# Altium PCB Copy of KDAT_PCB.PcbDoc
Units mil, origin at the board's own origin, x right, y up, seen from the top; angles counter-clockwise.
Board outline 3385 x 2285 mil, 2 copper layers (Top Layer, Bottom Layer); 26 components, 16 nets, 69 pads, 0 vias.
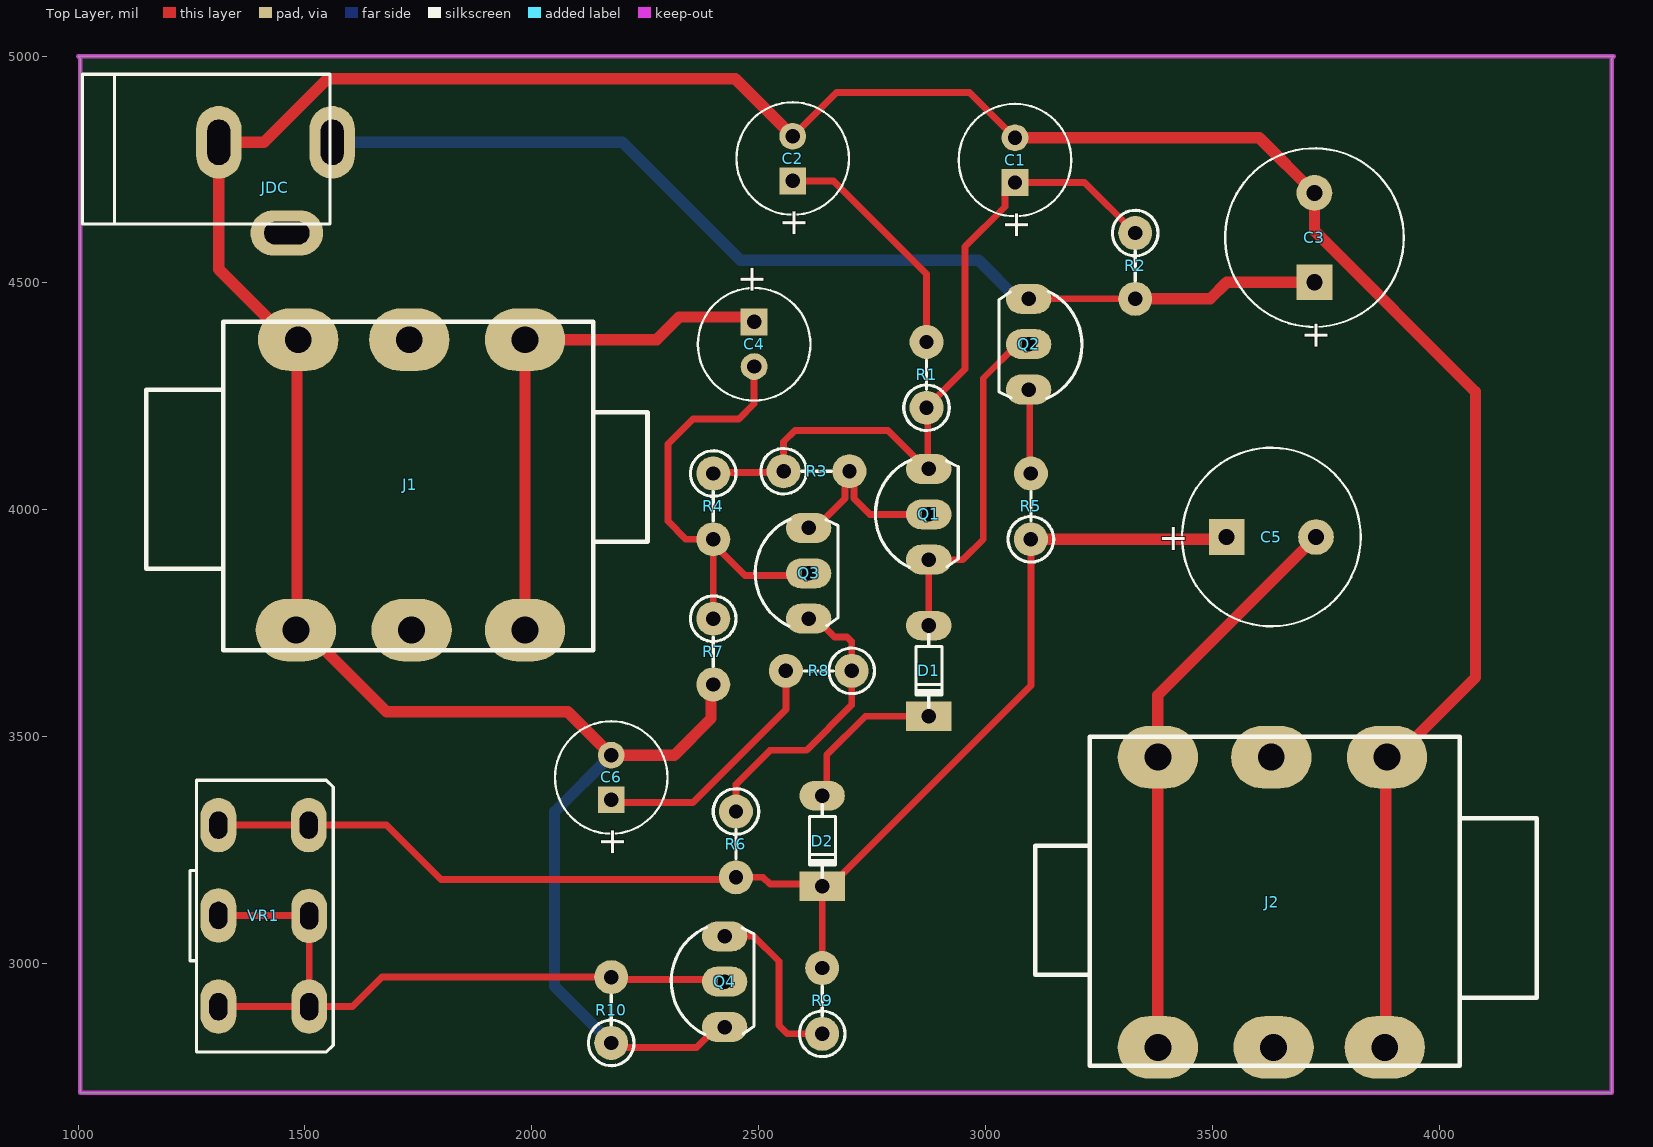
[diagram p0: Top Layer view]
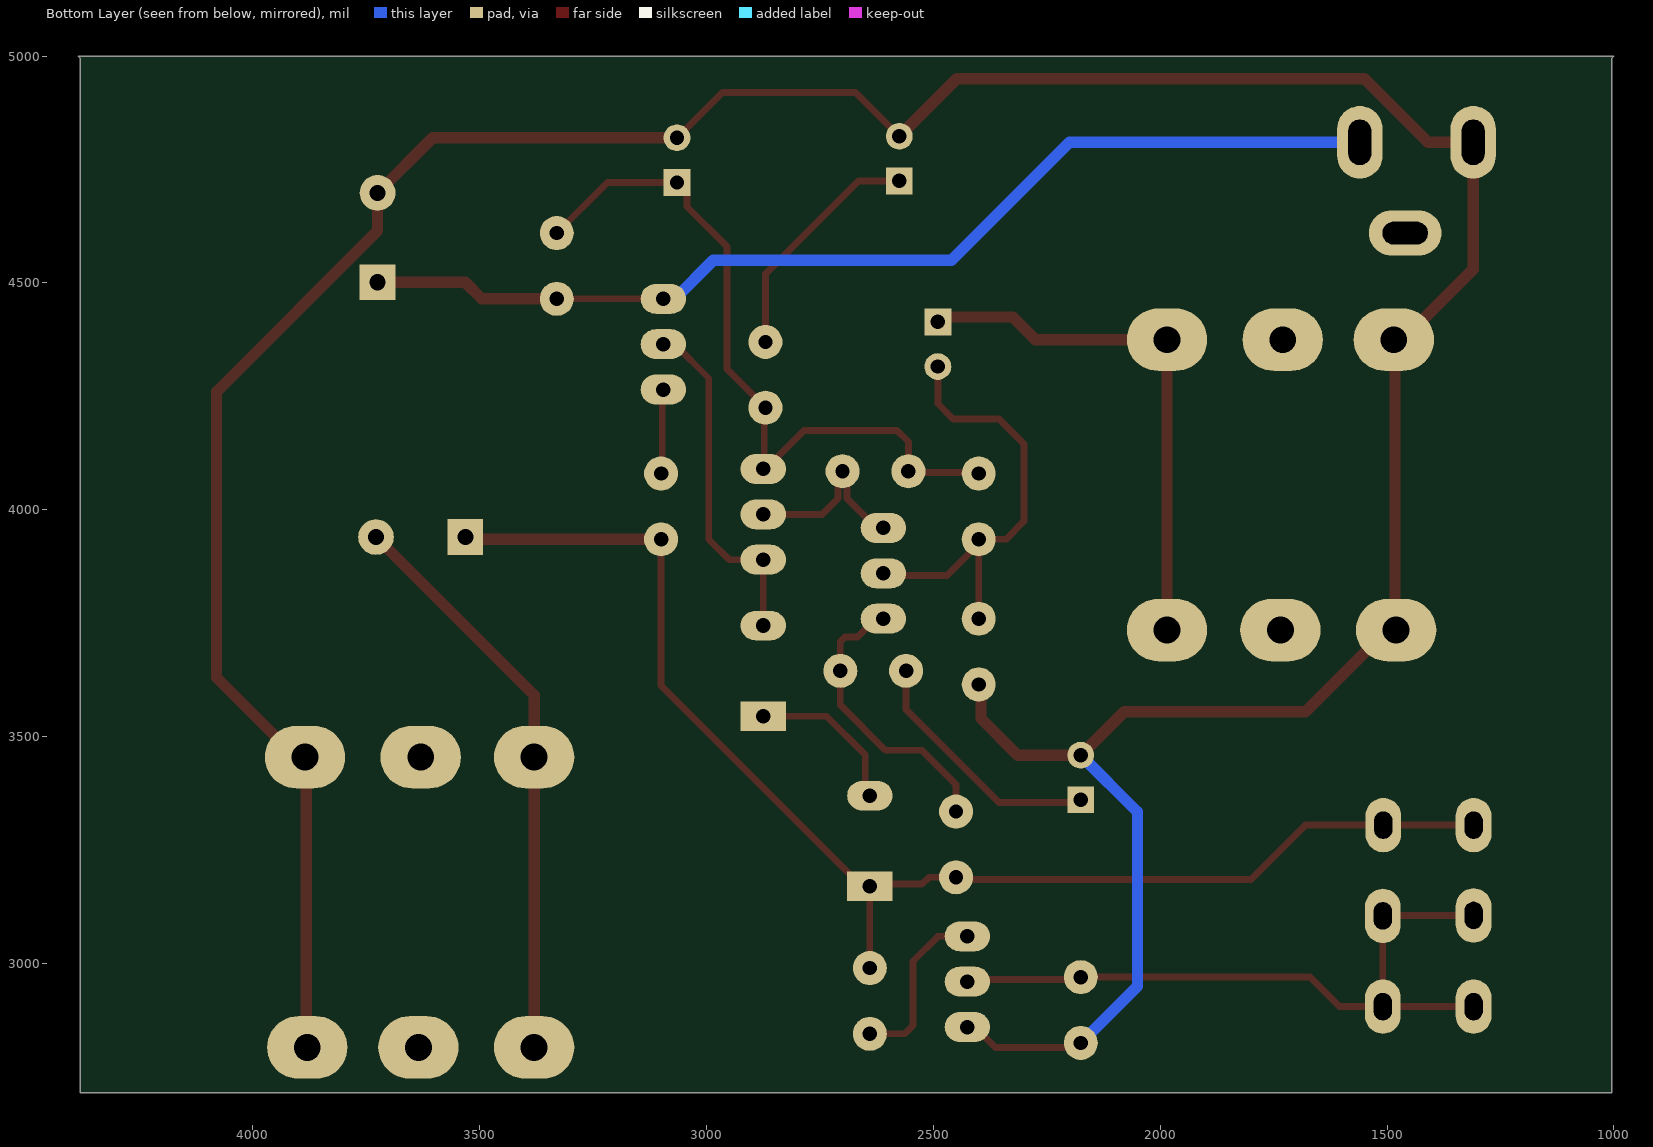
[diagram p1: Bottom Layer view, seen from below]

## Layer stack, top to bottom
Top Solder: solder mask 0.4, Solder Resist, Dk 3.5
Top Layer: signal copper 1.4
Dielectric 1: dielectric 12.6, FR-4, Dk 4.8
Bottom Layer: signal copper 1.4
Bottom Solder: solder mask 0.4, Solder Resist, Dk 3.5

## Board outline
1005,2715 4380,2715 4380,4995 4385,5000 1000,5000 1005,4995

## Design rules (kind name [scope] priority, off if disabled: settings)
Clearance [All] p1: gap=12 ignorepadtopadclearanceinfootprint=FALSE
PolygonConnect [All] p1: connectstyle=Relief reliefconductorwidth=10 reliefentries=4 polygonreliefangle="90 Angle" airgapwidth=10
RoomDefinition KĐAT_Sch [InComponentClass('KĐAT_Sch')] p1: confinementstyle=ConfineIn formatcopy=TRUE lockcomponents=FALSE outline 0,2715 4382.5,2715 4382.5,4997.5 0,4997.5
RoutingVias [All] p1: holewidth=0.4 width=0.8 viastyle="Through Hole" minholewidth=0.4 minwidth=0.8 maxholewidth=0.4 maxwidth=0.8
SolderMaskExpansion [All] p1: expansion=4 istentingtop=FALSE
Width [All] p1: maxlimit=30 minlimit=12 preferedwidth=15
30 further rules are at their usual default settings.

## Classes and differential pairs
component class KĐAT_Sch: C1 C2 C4 C6 D1 D2 J1 J2 JDC Q1 Q2 Q3 Q4 R1 R2 R3 R4 R5 R6 R7 R8 R9 R10 VR1

## Components (designator, comment, footprint, x,y, rotation, side; value= is the part's Value field where it differs from the comment)
C1 "220uF" CA-ALU-6.3 3065,4770.79 r90 top value=104
C2 "470uF" CA-ALU-6.3 2575,4774.21 r90 top value=104
C3 "2200uF" CA-ALU-10 3725,4600 r90 top value=104
C4 "10uF" CA-ALU-6.3 2490,4365 r270 top value=104
C5 "2200uF" CA-ALU-10 3630,3940 r0 top value=104
C6 "330uF" CA-ALU-6.3 2175,3410 r90 top value=104
D1 "1N4148" DIO-0.5A-SMALL 2875,3645 r90 top value=1N5007
D2 "1N4148" DIO-0.5A-SMALL 2640,3270 r90 top value=1N5007
J1 "AUDIO MIC BLACK HEADER" "CON MIC2" 1490,3940 r0 top
J2 "AUDIO MIC BLACK HEADER" "CON MIC2" 3875,3250 r180 top
JDC "Jac DC" DC0 1435,4710 r0 top
Q1 "C828" TO92-123 2875,3990 r90 top value=C1815
Q2 "A564" TO92-123 3095,4365 r270 top value=A1015
Q3 "C828" TO92-123 2610,3860 r90 top value=C1815
Q4 "C828" TO92-123 2425,2960 r90 top value=C1815
R1 "27K" RES-1/4WD 2870,4290 r90 top
R2 "330" RES-1/4WD 3330,4545 r270 top
R3 "15K" RES-1/4WD 2620,4085 r0 top
R4 "27K" RES-1/4WD 2400,4015 r270 top
R5 "1" RES-1/4WD 3100,4000 r90 top
R6 "22K" RES-1/4WD 2450,3270 r270 top
R7 "100K" RES-1/4WD 2400,3695 r270 top
R8 "1K" RES-1/4WD 2640,3645 r180 top
R9 "1" RES-1/4WD 2640,2910 r90 top
R10 "470" RES-1/4WD 2175,2890 r90 top
VR1 "470" VR-D1 1309.27,3105 r270 top value="Volume Dual 50K"

## Footprints (in the part's own frame and the unit in brackets; to place one, negate y for a bottom-side part, rotate by r counter-clockwise, add the part's x,y. Pads: shape width x height; smd on the part's side, far side on the other; paste and mask are expansions set on the pad)
CA-ALU-6.3 [mm] "Polarized capacitors, Aluminum Electrolytic Capacitors, 2-Leads, Body 6.3x15x2.5x0.5"
  rect 1.5x1.5 hole 0.8: 1(-1.25,0)
  round 1.5 hole 0.8: 2(1.25,0)
  silkscreen extent -3.15,-3.15 3.15,3.15, body extent -3.12,-3.15 3.18,3.15, height 11
CA-ALU-10 [mm] "Polarized capacitors, Aluminum Electrolytic Capacitors, 2-Leads, Body 10x20x5x0.6"
  rect 2x2 hole 0.9: 1(-2.5,0)
  round 2 hole 0.9: 2(2.5,0)
  silkscreen extent -5,-5 5,5, body extent -5.08,-5.08 5.08,5.08, height 20.52
"CON MIC2" [mm]
  oval 4.5x3.5 hole 1.5: 1(-0.254,-5.207) 1(-0.127,11.049) 2(6.096,11.049) 2(6.223,-5.207) 3(12.573,-5.207) 3(12.573,11.049)
  silkscreen extent -8.64,-6.35 19.43,12.06, body extent -12.47,-6.23 19.33,11.97, height 16.3
DC0 [mil] "Jac DC input"
  oval 100x160 hole 50 slot 100 at 90 deg: 1(125,100) 2(-125,100)
  oval 160x100 hole 50 slot 100 at 0 deg: 3(25,-100)
  silkscreen extent -425,-80 120,250, body extent -410,-105 134,269, height 434
DIO-0.5A-SMALL [mil] "Diode muoi, W 80mil, L 300mil"
  oval 65x100 hole 32: 1(100,0)
  rect 65x100 hole 32: 2(-100,0)
  silkscreen extent -80,-30 80,28, body extent -108,-33 108,32, height 61
RES-1/4WD [mil]
  round 75 hole 31.5: 1(-65,0) 2(80,0)
  silkscreen extent -115,-50 40,50, body extent -112,-45 92,46, height 379
TO92-123 [mil] "TO-92"
  oval 66x100 hole 32: 1(-100,0) 2(0,0) 3(100,0)
  silkscreen extent -117,-65 120,118, body extent -109,-66 109,95, height 245
VR-D1 [mil] "Volume control Dual"
  oval 120x78.74 hole 40 slot 60 at 0 deg: 1(-200,0) 2(-1,0) 3(200,0) 4(-200,199) 5(0,200) 6(200,200)
  silkscreen extent -299,-63 300,253, body extent -339,-1309 331,299, height 835

## Part data
C1 C2 C3 C4 C5 C6: library part CN-ALU-DIP, "Capacitor (Semiconductor SIM Model)", LatestRevisionDate=17-Jul-2002, LatestRevisionNote="Re-released for DXP Platform.", PackageReference=C1206, Publisher="Altium Limited"
D1 D2: library part Diode, "Default Diode", Code - JEDEC=DO-214-AB, Published=8-Jun-2000, Publisher="Altium Limited", Revision="July-2002: Re-released for DXP Platform."
J1 J2: library part "CON MIC2", "Connector, 3.5mm Stereo Audio Socket, Black, 2 break contacts (normals) and 2 auxiliary make contacts", Category=Connector, Connector type="AUDIO BLACK HEADER", Status=Production
JDC: library part DCIN, "Jac DC input"
Q1 Q3 Q4: library part 2N222, "NPN 600mW, ECB"
Q2: library part 2N3906, "PNP 600mW, ECB"
R1 R2 R3 R4 R5 R6 R7 R8 R9 R10: library part Res, "Res", Manufacturer="Generic Components", Class=Passive, Published=08/06/2000, Publisher="Altium Hobart Technology Centre", SubClass=R
VR1: library part VR-D, "Volume control Dual"

## Nets (pads, with @x,y where several pads share a name; then routed paths per layer and width w, separated by ;. In a path a pad name is that pad's centre, name@x,y a point inside that pad or via, vN(x,y) a via of type N, cw(c..) or ccw(c..) an arc to the next point about the centre after c; other vN are vias at no path point)
GND: C1.2 C2.2 C3.2 C6.2 J1.1 J2.1 JDC.2 Q4.1 R7.2 R10.1 | length 8100.2
  Top Layer w15: R10.1 2185,2815 2363,2815 2408,2860 Q4.1 ; C2.2 2575,4835 2586.57,4835 2671.57,4920 2965,4920 C1.2
  Top Layer w25: R7.2 2395,3610 2395,3540 2314.21,3459.21 C6.2 2079.21,3555 1679.68,3555 1499.68,3735 1480,3735 1482.5,3737.5 1482.5,4372.5 1485,4375 1465.32,4375 1310,4530.31 JDC.2 1409.82,4810 1549.82,4950 2448.43,4950 C2.2 ; C1.2 3603.43,4820 C3.2 3725,4614.96 4080,4259.96 4080,3630.32 3904.68,3455 3885,3455 3882.5,3452.5 3882.5,2817.5 J2.1@3880,2815
  Bottom Layer w25: R10.1 2050,2950 2050,3334.21 C6.2
NetC1_1: C1.1 Q1.3 R1.1 R2.1 R3.1 R4.1 | length 1618.3
  Top Layer w15: R4.1 2402.5,4082.5 2552.5,4082.5 R3.1 2555,4150 2580,4175 2785,4175 2870,4090 Q1.3 2872.5,4092.5 2872.5,4222.5 R1.1 2955,4310 2955,4580 3042.97,4667.97 3042.97,4699.55 C1.1 3218.43,4721.57 R2.1
  Bottom Layer w15: R3.1 R3.1@2555,4090
NetC2_1: C2.1 R1.2 | length 529.9
  Top Layer w15: C2.1 2665,4725 2870,4520 R1.2
NetC3_1: C3.1 JDC.1 Q2.1 R2.2 | length 2335
  Top Layer w15: Q2.1 R2.2 ; C3.1@3716.57,4510 C3.1
  Top Layer w25: R2.2 3495,4465 3531.57,4501.57 C3.1
  Bottom Layer w25: JDC.1 2200,4810 2460,4550 2985,4550 3070,4465 Q2.1
NetC4_1: C4.1 J1.3 | length 1170.2
  Top Layer w25: J1.3@1985,3735 1985,4375 2275,4375 2325,4425 2479.21,4425 C4.1
NetC4_2: C4.2 Q3.2 R4.2 R7.1 | length 1011.4
  Top Layer w15: R7.1 R4.2@2400,3925 ; C4.2 2490,4233.79 2456.21,4200 2355,4200 2300,4145 2300,3975 2340,3935 R4.2 R4.2@2400,3925 ; Q3.2 2605,3855 2470,3855 R4.2@2400,3925
NetC5_1: C5.1 D2.2 R5.1 R6.2 R9.2 VR1.1 VR1.4 | length 2970.2
  Top Layer w15: VR1.1 VR1.4 1680,3305 1800,3185 2445,3185 R6.2 2510,3190 2525,3175 2635,3175 D2.2 ; R9.2 D2.2 ; R5.1 3100,3612.5 2657.5,3170 D2.2
  Top Layer w25: R5.1 3526.57,3935 C5.1
NetC5_2: C5.2 J2.3 | length 1269.3
  Top Layer w25: J2.3@3380,2815 3380,3455 3380,3591.57 C5.2
NetC6_1: C6.1 R8.2 | length 557.3
  Top Layer w15: C6.1 2180.79,3355 2355,3355 2560,3560 R8.2
NetD1_1: D1.1 Q1.1 Q2.2 | length 769.7
  Top Layer w15: D1.1 Q1.1 2950,3890 2995,3935 2995,4290 3070,4365 Q2.2
NetD1_2: D1.2 D2.1 | length 354.4
  Top Layer w15: D2.1 2650,3380 2650,3460 2735,3545 D1.2
NetQ1_2: Q1.2 Q3.3 R3.2 | length 460.5
  Top Layer w15: Q3.3 2625,3960 2690,4025 2690,4075 R3.2 2710,4075 2710,4025 2745,3990 Q1.2@2890,3990
  Bottom Layer w15: Q3.3 Q3.3@2640.8,3960
NetQ2_3: Q2.3 R5.2 | length 187.1
  Top Layer w15: Q2.3 3097.5,4262.5 3097.5,4082.5 R5.2
NetQ3_1: Q3.1 R6.1 R8.1 | length 643.2
  Top Layer w15: R6.1 2450,3395 2525,3470 2605,3470 2705,3570 R8.1 2705,3710 2695,3720 2667,3720 2627,3760 Q3.1
NetQ4_2: Q4.2 R10.2 VR1.2 VR1.3 VR1.5 VR1.6 | length 1547.2
  Top Layer w15: VR1.3 VR1.6 ; VR1.2 1309.77,3105.5 1508.77,3105.5 VR1.5 VR1.6 ; Q4.2 2420,2965 2180,2965 R10.2 1670,2970 1605,2905 VR1.6
NetQ4_3: Q4.3 R9.1 | length 386.8
  Top Layer w15: Q4.3 2490,3060 2545,3005 2545,2863.79 2563.79,2845 R9.1
pads on no net: J1.2 J2.2 JDC.3

## Keep-outs
Top Layer:
  the board outline again, w10

## Text inside footprints (layer, text, board x,y; h text height)
C1: Top Overlay "+" at 3094.02,4594.61 h59.06 r90
C2: Top Overlay "+" at 2604.02,4598.03 h59.06 r90
C3: Top Overlay "+" at 3754.02,4350.98 h59.06 r90
C4: Top Overlay "+" at 2460.98,4541.18 h59.06 r270
C5: Top Overlay "+" at 3380.98,3910.98 h59.06
C6: Top Overlay "+" at 2204.02,3233.82 h59.06 r90